# Altium PCB VC.PcbDoc
Units mm, origin at the board's own origin, x right, y up, seen from the top; angles counter-clockwise.
Board outline 84 x 54.9 mm, 2 copper layers (Top Layer, Bottom Layer); 15 components, 10 nets, 31 pads, 0 vias.
Unrouted connection lines stored in the file: 21.
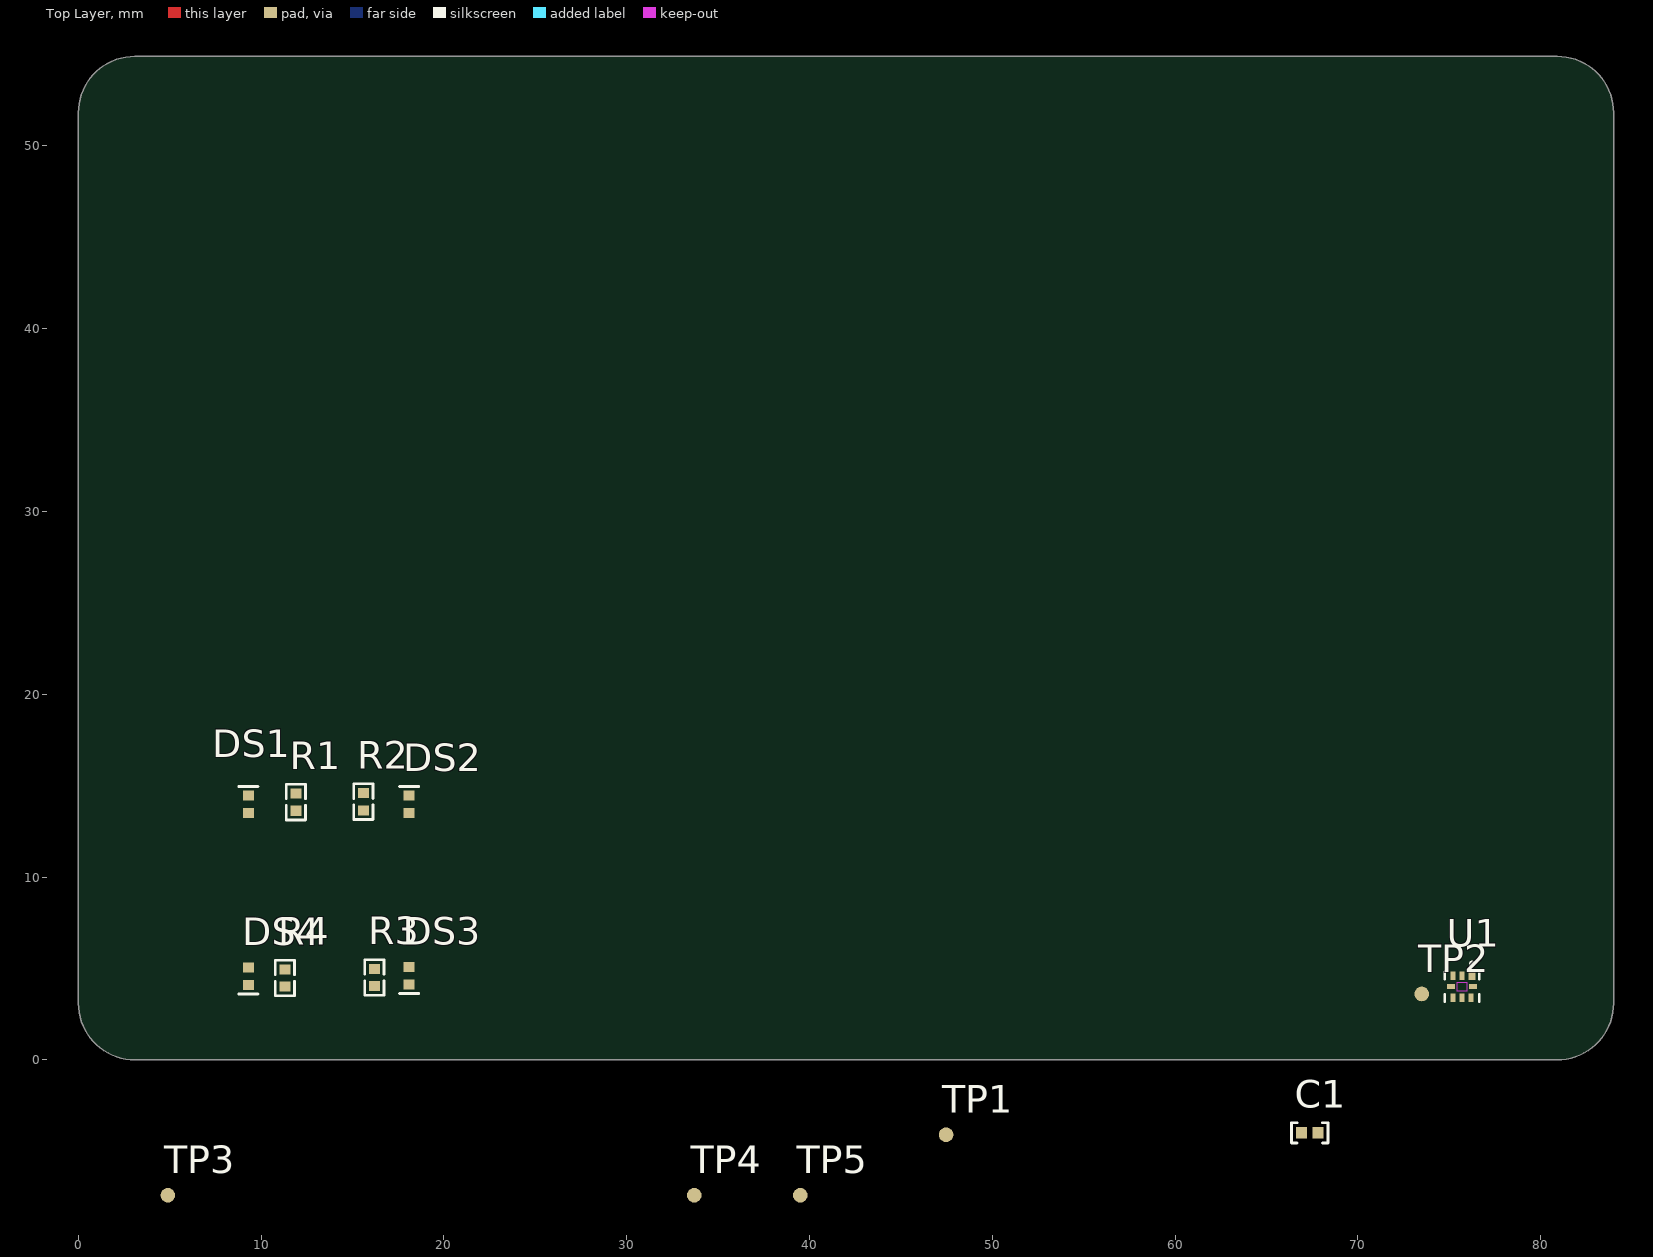
[diagram p0: Top Layer view]
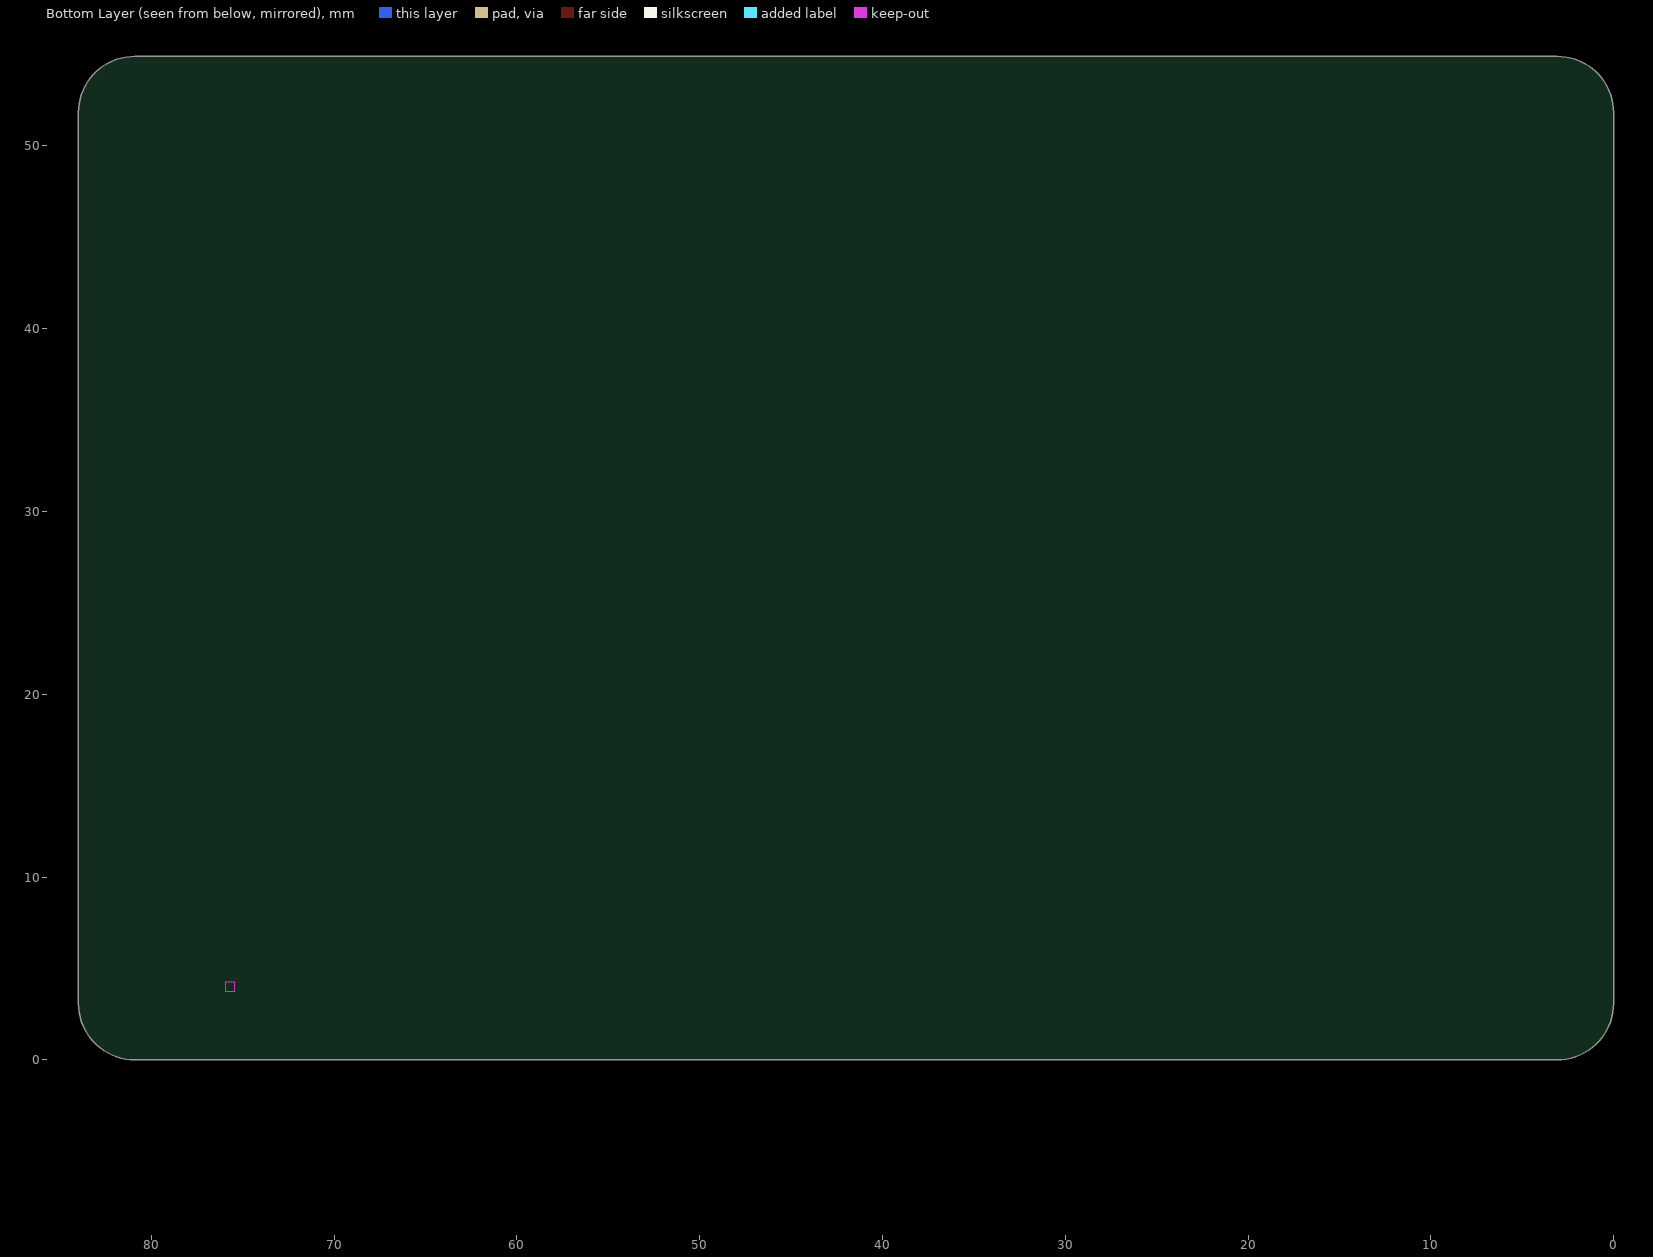
[diagram p1: Bottom Layer view, seen from below]

## Layer stack, top to bottom
Top Solder: solder mask 0.0102, Solder Resist, Dk 3.5
Top Layer: signal copper 0.0356
Dielectric 1: dielectric 0.32, FR-4, Dk 4.8
Bottom Layer: signal copper 0.0356
Bottom Solder: solder mask 0.0102, Solder Resist, Dk 3.5

## Board outline
3.1,0 cw(c3.1,3.1) 0,3.1 0,51.8 cw(c3.1,51.8) 3.1,54.9 80.9,54.9 cw(c80.9,51.8) 84,51.8 84,3.1 cw(c80.9,3.1) 80.9,0

## Design rules (kind name [scope] priority, off if disabled: settings)
Clearance [All] p1: gap=0.254 ignorepadtopadclearanceinfootprint=FALSE except(0: Arc-Hole Track-Hole SMDPad-Hole THPad-Hole Via-Hole Fill-Hole Poly-Hole Region-Hole Text-Hole; 0.2: Arc-Arc Arc-Track Track-Track)
PolygonConnect [All] p1: connectstyle=Relief reliefconductorwidth=0.254 reliefentries=4 polygonreliefangle="90 Angle" airgapwidth=0.254
RoutingVias [All] p1: holewidth=0.711 width=1.27 viastyle="Through Hole" minholewidth=0.711 minwidth=1.27 maxholewidth=0.711 maxwidth=1.27
SolderMaskExpansion [All] p1: expansion=0.102 istentingtop=FALSE
Width [All] p1: maxlimit=5 minlimit=0.15 preferedwidth=0.254
30 further rules are at their usual default settings.

## Components (designator, comment, footprint, x,y, rotation, side; value= is the part's Value field where it differs from the comment)
C1 "220nF" CAP_0402 67.375,-4 r180 top
DS1 "QBLP595-IG" LED_0402 9.3,13.975 r90 top
DS2 "QBLP595-IG" LED_0402 18.1,13.975 r90 top
DS3 "QBLP595-IG" LED_0402 18.1,4.6 r270 top
DS4 "QBLP595-IG" LED_0402 9.3,4.575 r270 top
R1 "240R" RES_0402 11.9,14.1 r90 top
R2 "240R" RES_0402 15.6,14.125 r90 top
R3 "240R" RES_0402 16.2,4.5 r270 top
R4 "240R" RES_0402 11.3,4.475 r270 top
TP1 "Test Point SMD Round 0.8mm" "Test Point Round 0.8mm" 47.475,-4.1 r270 top
TP2 "Test Point SMD Round 0.8mm" "Test Point Round 0.8mm" 73.5,3.6 r180 top
TP3 "Test Point SMD Round 0.8mm" "Test Point Round 0.8mm" 4.9,-7.41 r270 top
TP4 "Test Point SMD Round 0.8mm" "Test Point Round 0.8mm" 33.7,-7.41 r270 top
TP5 "Test Point SMD Round 0.8mm" "Test Point Round 0.8mm" 39.5,-7.41 r270 top
U1 "NT3H2111_2211" IC_NT3H2211W0FHKH 75.7,4 r270 top

## Footprints (in the part's own frame and the unit in brackets; to place one, negate y for a bottom-side part, rotate by r counter-clockwise, add the part's x,y. Pads: shape width x height; smd on the part's side, far side on the other; paste and mask are expansions set on the pad)
CAP_0402 [mm] "Chip Capacitor 0402, 2-Leads, Body, IPC Medium Density"
  rect 0.62x0.62 smd mask+0.05: 1(-0.45,0) 2(0.45,0)
  silkscreen extent -1,-0.55 1,0.55, body extent -0.53,-0.28 0.53,0.28, height 0.5
IC_NT3H2211W0FHKH [mm]
  rect 0.45x0.37 smd paste-1 mask+0.05: 1(-0.6,0.55)
  rect 0.45x0.27 smd paste-1 mask+0.05: 2(-0.6,0) 3(-0.6,-0.5) 5(0.6,-0.5) 6(0.6,0) 7(0.6,0.5)
  rect 0.27x0.45 smd paste-1 mask+0.05: 4(0,-0.6) 8(0,0.6)
  Keep-Out Layer region: 0.25,-0.25 -0.25,-0.25 -0.25,0.25 0.25,0.25
  silkscreen extent -1.32,-0.95 0.82,0.95, body extent -0.8,-0.82 0.8,0.78, height 0.5
LED_0402 [mm]
  rect 0.55x0.6 smd mask+0.05: 1(-0.475,0) 2(0.475,0)
  silkscreen extent 0.97,-0.53 0.97,0.53, body extent -0.52,-0.25 0.48,0.25, height 0.5
RES_0402 [mm]
  rect 0.55x0.6 smd mask+0.05: 1(-0.475,0) 2(0.475,0)
  silkscreen extent -0.97,-0.53 0.97,0.53, body extent -0.5,-0.25 0.5,0.25, height 0.4
"Test Point Round 0.8mm" [mm]
  round 0.8 smd mask+0.05: 1(0,0)

## Part data
C1: library part CAP_220nF-10V-10%-0402, "0.22µF ±10% 10V Ceramic Capacitor X7R 0402 (1005 Metric)", Case/Package=0402, Manufacturer="Samsung Electro-Mechanics", Manufacturer Part Number=CL05B224KP5NNNC, Supplier-1=Digikey
DS1 DS2 DS3 DS4: library part LED_Green_0402_3.1V_QBLP595-IG, "LED Uni-Color True Green 2-Pin Chip 0402(1006Metric) T/R", Case Code (Imperial)=0402, Case Code (Metric)=1005, Color=Green, Forward Voltage=3.1V, Lens Color=Colorless, Manufacturer=QT-Brightek, Supplier Part Number 1=1516-1216-1-ND, Test Current=20mA, Case/Package=0402, Category=LEDs, ComponentLink1Description="http://www.qt-brightek.com/datasheet/QBLP595 Series.pdf?src-supplier=Digi-Key", ComponentLink1URL="http://www.qt-brightek.com/datasheet/QBLP595 Series.pdf?src-supplier=Digi-Key", Dominant Wavelength=520nm, Height=0.6mm, Length=1mm, Lens Size=0.5mm, Lens Style=Flat, Lens Transparency=Clear, Luminous Intensity=600mcd, Manufacturer Part Number=QBLP595-IG, Mount="Surface Mount", Packaging="Cut Tape", Pricing 1="1=0.39, 10=0.306, 100=0.1373, 500=0.12402, 1000=0.10187, 2000=0.08858 (USD)", RoHS=Yes, RoHS Compliant=Yes, Series=QBLP595, Stock 1=385550, Supplier 1=Digi-Key, Viewing Angle=140°, Width=0.5mm
R1 R2 R3 R4: library part RES_240R-0.1W-1%-0402, "240 Ohms ±1% 0.1W, 1/10W Chip Resistor 0402 (1005 Metric) Automotive AEC-Q200 Thick Film", Case/Package=0402, Manufacturer="Panasonic Electronic Components", Manufacturer Part Number=ERJ-2RKF2400X, Supplier-1=Digikey
TP1 TP2 TP3 TP4 TP5: "Testpoint SMD Round"
U1: library part IC_NFC_, "RFID Transponder IC 13.56MHz ISO 14443 I²C 3.6V 8-XFQFN Exposed Pad"

## Nets (pads, with @x,y where several pads share a name; then routed paths per layer and width w, separated by ;. In a path a pad name is that pad's centre, name@x,y a point inside that pad or via, vN(x,y) a via of type N, cw(c..) or ccw(c..) an arc to the next point about the centre after c; other vN are vias at no path point)
GND: C1.1 DS1.2 DS2.2 DS3.2 DS4.2 TP5.1 U1.2
NetC1_2: C1.2 R1.2 R2.2 R3.2 R4.2 TP1.1 U1.6 U1.7
NetDS1_1: DS1.1 R1.1
NetDS2_1: DS2.1 R2.1
NetDS3_1: DS3.1 R3.1
NetDS4_1: DS4.1 R4.1
NetTP2_1: TP2.1 U1.4
NetTP3_1: TP3.1 U1.3
NetTP4_1: TP4.1 U1.5
NetU1_1: U1.1 U1.8

## Silkscreen, mask and mechanical layers (free items; w line width, h text height)
Mechanical 1:
  the board outline again, w0.2